# Altium PCB ESP32-USBC.PcbDoc (part 2 of 3)
Units mil, origin at the board's own origin, x right, y up, seen from the top; angles counter-clockwise.
Board outline 2700 x 1000 mil, 4 copper layers (L1, L2, L3, L4), stack 61.583 mil thick; 64 components, 73 nets, 299 pads, 160 vias.
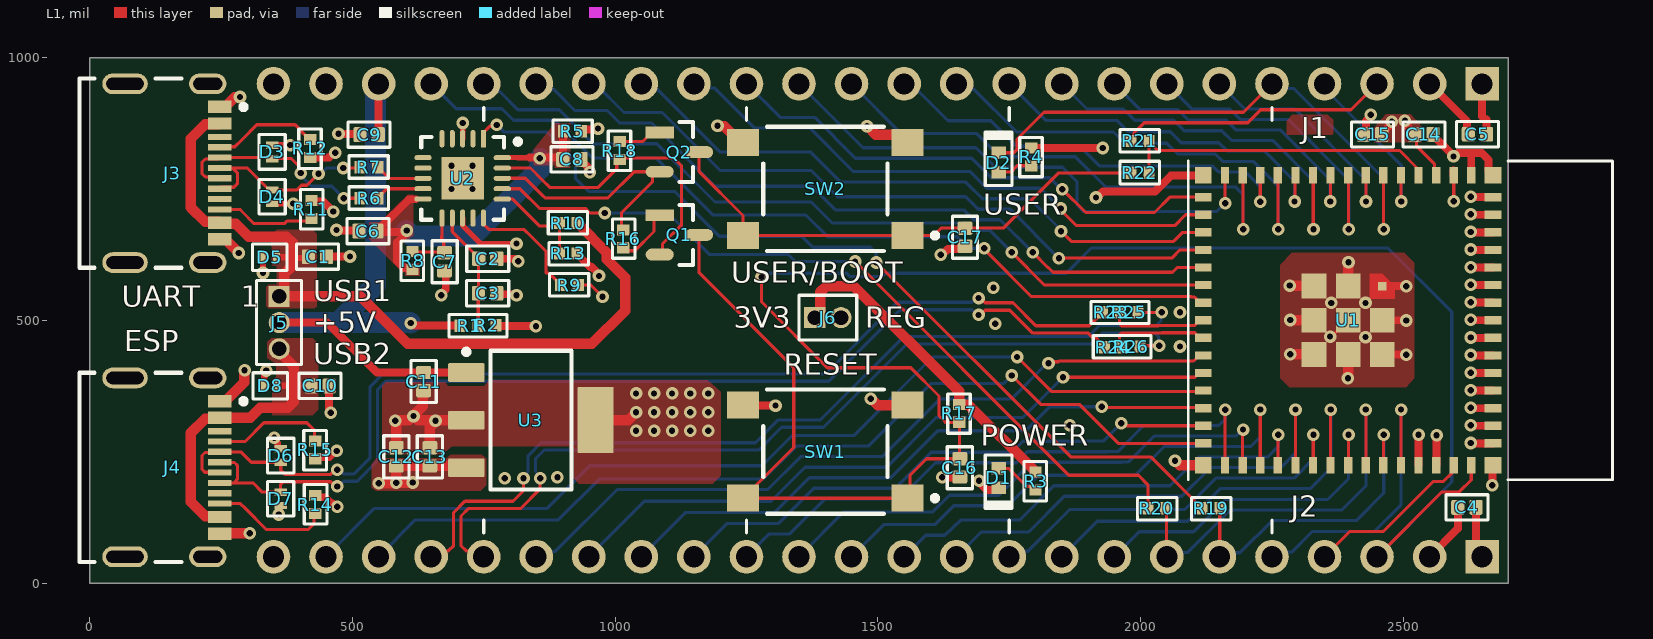
[diagram p0: L1 view]

## Part data (continued)
R3 R4: library part RC0402FR-071KL, "1 kOhms ±1% 0.063W, 1/16W Chip Resistor 0402 (1005 Metric) Moisture Resistant Thick Film", Case Code (Imperial)=0402, LCSC Part Number=C106235, Manufacturer="Yageo Group", Max Operating Temperature=155°C, Min Operating Temperature=-55°C, Power Dissipation=62.5mW, Power Rating=63mW, Temperature Coefficient=100ppm/°C, Tolerance=1%, Voltage Rating=50V, Case Code (Metric)=0402, Case/Package=0402, Category="Chip SMD Resistors", China RoHS=Non-Compliant, ComponentLink1Description=https://datasheet.octopart.com:443/RC0402FR-071KL-Yageo-datasheet-175887523.pdf?src-supplier=IHS, ComponentLink1URL=https://datasheet.octopart.com:443/RC0402FR-071KL-Yageo-datasheet-175887523.pdf?src-supplier=IHS, ComponentLink2Description=https://datasheet.octopart.com:443/RC0402FR-071KL-Yageo-datasheet-164759695.pdf?src-supplier=Upverter, ComponentLink2URL=https://datasheet.octopart.com:443/RC0402FR-071KL-Yageo-datasheet-164759695.pdf?src-supplier=Upverter, ComponentLink3Description=https://datasheet.octopart.com:443/RC0402FR-071KL-Yageo-datasheet-103092701.pdf?src-supplier=Upverter, ComponentLink3URL=https://datasheet.octopart.com:443/RC0402FR-071KL-Yageo-datasheet-103092701.pdf?src-supplier=Upverter, ComponentLink4Description=https://sigma.octopart.com:443/138820526/technical_drawing/Yageo-RC0402FR-071KL.pdf?src-supplier=Upverter, ComponentLink4URL=https://sigma.octopart.com:443/138820526/technical_drawing/Yageo-RC0402FR-071KL.pdf?src-supplier=Upverter, ComponentLink5Description=https://datasheet.octopart.com:443/RC0402FR-071KL-Yageo-datasheet-98239111.pdf?src-supplier=Upverter, ComponentLink5URL=https://datasheet.octopart.com:443/RC0402FR-071KL-Yageo-datasheet-98239111.pdf?src-supplier=Upverter, ComponentLink6Description=https://datasheet.octopart.com:443/RC0402FR-071KL-Yageo-datasheet-10408619.pdf?src-supplier=Newark, ComponentLink6URL=https://datasheet.octopart.com:443/RC0402FR-071KL-Yageo-datasheet-10408619.pdf?src-supplier=Newark, ComponentLink7Description=https://datasheet.octopart.com:443/RC0402FR-071KL-Yageo-datasheet-8324527.pdf?src-supplier=Newark, ComponentLink7URL=https://datasheet.octopart.com:443/RC0402FR-071KL-Yageo-datasheet-8324527.pdf?src-supplier=Newark, ComponentLink8Description=https://datasheet.octopart.com:443/RC0402FR-071KL-Yageo-datasheet-62067350.pdf?src-supplier=Farnell, ComponentLink8URL=https://datasheet.octopart.com:443/RC0402FR-071KL-Yageo-datasheet-62067350.pdf?src-supplier=Farnell, ComponentLink9Description=https://datasheet.octopart.com:443/RC0402FR-071KL-Yageo-datasheet-12531192.pdf?src-supplier=Future+Electronics, ComponentLink9URL=https://datasheet.octopart.com:443/RC0402FR-071KL-Yageo-datasheet-12531192.pdf?src-supplier=Future+Electronics, ComponentLink10Description=https://datasheet.octopart.com:443/RC0402FR-071KL-Yageo-datasheet-137700087.pdf?src-supplier=Future+Electronics, ComponentLink10URL=https://datasheet.octopart.com:443/RC0402FR-071KL-Yageo-datasheet-137700087.pdf?src-supplier=Future+Electronics, ComponentLink11Description=https://datasheet.octopart.com:443/RC0402FR-071KL-Yageo-datasheet-8324255.pdf?src-supplier=Future+Electronics, ComponentLink11URL=https://datasheet.octopart.com:443/RC0402FR-071KL-Yageo-datasheet-8324255.pdf?src-supplier=Future+Electronics, ComponentLink12Description=https://datasheet.octopart.com:443/RC0402FR-071KL-Yageo-datasheet-8329306.pdf?src-supplier=element14, ComponentLink12URL=https://datasheet.octopart.com:443/RC0402FR-071KL-Yageo-datasheet-8329306.pdf?src-supplier=element14, ComponentLink13Description=https://datasheet.octopart.com:443/RC0402FR-071KL-Yageo-datasheet-505231.pdf?src-supplier=element14, ComponentLink13URL=https://datasheet.octopart.com:443/RC0402FR-071KL-Yageo-datasheet-505231.pdf?src-supplier=element14, ComponentLink14Description=https://datasheet.octopart.com:443/RC0402FR-071KL-Yageo-datasheet-175423674.pdf?src-supplier=SOS+electronic, ComponentLink14URL=https://datasheet.octopart.com:443/RC0402FR-071KL-Yageo-datasheet-175423674.pdf?src-supplier=SOS+electronic, ComponentLink15Description=https://datasheet.octopart.com:443/RC0402FR-071KL-Yageo-datasheet-148775077.pdf?src-supplier=TME, ComponentLink15URL=https://datasheet.octopart.com:443/RC0402FR-071KL-Yageo-datasheet-148775077.pdf?src-supplier=TME, ComponentLink16Description=https://datasheet.octopart.com:443/RC0402FR-071KL-Yageo-datasheet-79472498.pdf?src-supplier=Megastar, ComponentLink16URL=https://datasheet.octopart.com:443/RC0402FR-071KL-Yageo-datasheet-79472498.pdf?src-supplier=Megastar, ComponentLink17Description=https://datasheet.octopart.com/RC0402FR-071KL-Yageo-datasheet-73766026.pdf, ComponentLink17URL=https://datasheet.octopart.com/RC0402FR-071KL-Yageo-datasheet-73766026.pdf, ComponentLink18Description=http://sigma.octopart.com:80/rohs_statement/Yageo-company-2.pdf?src-supplier=Compliance+Statements, ComponentLink18URL=http://sigma.octopart.com:80/rohs_statement/Yageo-company-2.pdf?src-supplier=Compliance+Statements, ComponentLink19Description=http://sigma.octopart.com:80/conflict_mineral_statement/Yageo-company-3.pdf?src-supplier=Compliance+Statements, ComponentLink19URL=http://sigma.octopart.com:80/conflict_mineral_statement/Yageo-company-3.pdf?src-supplier=Compliance+Statements, Composition="Thick Film", Depth=500µm, Height=350µm, Lead Free="Lead Free", Length=1mm, Lifecycle Status=Production, Manufacturer Part Number=RC0402FR-071KL, Military Standard=Not, Mounting Technology="Surface Mount", Number of Terminals=2, Packaging="Tape & Reel", Pins=2, Pricing="1=0.1, 10=0.007, 25=0.0068, 50=0.0062, 100=0.0056, 250=0.00308 (USD)", REACH SVHC=Yes, RoHS=Compliant, Schedule B="8533210045, 8533210045|8533210045|8533210045|8533210045|8533210045|8533210045|8533210045|8533210045|8533210045|8533210045|8533210045|8533210045|8533210045|8533210045|8533210045|8533210045|8533210045|8533210045|8533210045|8533210045|8533210045|8533210045|8533210045|85", Stock=292171, Supplier=DigiKey, Termination=SMD/SMT, Voltage Rating (AC)=50V, Voltage Rating (DC)=50V, Width=500µm, Working Voltage=50V
R6 R7 R21 R22: library part RC0402FR-0727RL, "27 Ohms ±1% 0.063W, 1/16W Chip Resistor 0402 (1005 Metric) Moisture Resistant Thick Film", Case Code (Imperial)=0402, Case Code (Metric)=1005, LCSC Part Number=C138021, Manufacturer="Yageo Group", Max Operating Temperature=155°C, Max Power Dissipation=63mW, Min Operating Temperature=-55°C, Power Dissipation=62.5mW, Temperature Coefficient=100ppm/°C, Tolerance=1%, Voltage Rating=50V, Case/Package=0402, Category="Chip SMD Resistors", China RoHS=Non-Compliant, ComponentLink1Description=https://datasheet.octopart.com:443/RC0402FR-0727RL-Yageo-datasheet-175887523.pdf?src-supplier=Newark, ComponentLink1URL=https://datasheet.octopart.com:443/RC0402FR-0727RL-Yageo-datasheet-175887523.pdf?src-supplier=Newark, ComponentLink2Description=https://datasheet.octopart.com:443/RC0402FR-0727RL-Yageo-datasheet-8324527.pdf?src-supplier=Newark, ComponentLink2URL=https://datasheet.octopart.com:443/RC0402FR-0727RL-Yageo-datasheet-8324527.pdf?src-supplier=Newark, ComponentLink3Description=https://datasheet.octopart.com:443/RC0402FR-0727RL-Yageo-datasheet-103092701.pdf?src-supplier=Upverter, ComponentLink3URL=https://datasheet.octopart.com:443/RC0402FR-0727RL-Yageo-datasheet-103092701.pdf?src-supplier=Upverter, ComponentLink4Description=https://datasheet.octopart.com:443/RC0402FR-0727RL-Yageo-datasheet-10408619.pdf?src-supplier=element14+APAC, ComponentLink4URL=https://datasheet.octopart.com:443/RC0402FR-0727RL-Yageo-datasheet-10408619.pdf?src-supplier=element14+APAC, ComponentLink5Description=https://datasheet.octopart.com:443/RC0402FR-0727RL-Yageo-datasheet-62067350.pdf?src-supplier=element14+APAC, ComponentLink5URL=https://datasheet.octopart.com:443/RC0402FR-0727RL-Yageo-datasheet-62067350.pdf?src-supplier=element14+APAC, ComponentLink6Description=https://datasheet.octopart.com:443/RC0402FR-0727RL-Yageo-datasheet-175423674.pdf?src-supplier=SOS+electronic, ComponentLink6URL=https://datasheet.octopart.com:443/RC0402FR-0727RL-Yageo-datasheet-175423674.pdf?src-supplier=SOS+electronic, ComponentLink7Description=https://datasheet.octopart.com:443/RC0402FR-0727RL-Yageo-datasheet-8329306.pdf?src-supplier=SOS+electronic, ComponentLink7URL=https://datasheet.octopart.com:443/RC0402FR-0727RL-Yageo-datasheet-8329306.pdf?src-supplier=SOS+electronic, ComponentLink8Description=https://datasheet.octopart.com:443/RC0402FR-0727RL-Yageo-datasheet-164759695.pdf?src-supplier=Future+Electronics, ComponentLink8URL=https://datasheet.octopart.com:443/RC0402FR-0727RL-Yageo-datasheet-164759695.pdf?src-supplier=Future+Electronics, ComponentLink9Description=https://datasheet.octopart.com:443/RC0402FR-0727RL-Yageo-datasheet-137700087.pdf?src-supplier=Future+Electronics, ComponentLink9URL=https://datasheet.octopart.com:443/RC0402FR-0727RL-Yageo-datasheet-137700087.pdf?src-supplier=Future+Electronics, ComponentLink10Description=https://datasheet.octopart.com:443/RC0402FR-0727RL-Yageo-datasheet-12531192.pdf?src-supplier=Future+Electronics, ComponentLink10URL=https://datasheet.octopart.com:443/RC0402FR-0727RL-Yageo-datasheet-12531192.pdf?src-supplier=Future+Electronics, ComponentLink11Description=https://datasheet.octopart.com:443/RC0402FR-0727RL-Yageo-datasheet-148775077.pdf?src-supplier=TME, ComponentLink11URL=https://datasheet.octopart.com:443/RC0402FR-0727RL-Yageo-datasheet-148775077.pdf?src-supplier=TME, ComponentLink12Description=https://datasheet.octopart.com/RC0402FR-0727RL-Yageo-datasheet-73766026.pdf, ComponentLink12URL=https://datasheet.octopart.com/RC0402FR-0727RL-Yageo-datasheet-73766026.pdf, ComponentLink13Description=http://sigma.octopart.com:80/rohs_statement/Yageo-company-2.pdf?src-supplier=Compliance+Statements, ComponentLink13URL=http://sigma.octopart.com:80/rohs_statement/Yageo-company-2.pdf?src-supplier=Compliance+Statements, ComponentLink14Description=http://sigma.octopart.com:80/conflict_mineral_statement/Yageo-company-3.pdf?src-supplier=Compliance+Statements, ComponentLink14URL=http://sigma.octopart.com:80/conflict_mineral_statement/Yageo-company-3.pdf?src-supplier=Compliance+Statements, Composition="Thick Film", Depth=500µm, Features="Moisture Resistant", Height=350µm, Lead Free="Lead Free", Length=1mm, Lifecycle Status=Production, Manufacturer Part Number=RC0402FR-0727RL, Military Standard=Not, Mounting Technology="Surface Mount", Number of Terminals=2, Number of Terminations=2, Pins=2, Power Rating=63mW, Pricing="1=0.1, 10=0.007, 25=0.0068, 50=0.0062, 100=0.0051, 250=0.00308 (USD)", REACH SVHC=Yes, RoHS=Compliant, Schedule B="8533210045, 8533210045|8533210045, 8533210045|8533210045|8533210045, 8533210045|8533210045|8533210045|8533210045", Stock=202809, Supplier=DigiKey, Termination=SMD/SMT, Voltage Rating (AC)=50V, Voltage Rating (DC)=50V, Weight=652.039032µg, Width=500µm, Working Voltage=50V
R9 R13 R16 R17 R18: library part AC0402FR-0710KL, "10 kOhms ±1% 0.063W, 1/16W Chip Resistor 0402 (1005 Metric) Automotive AEC-Q200, Moisture Resistant Thick Film", Case Code (Imperial)=0402, Case Code (Metric)=1005, Manufacturer="Yageo Group", Max Operating Temperature=155°C, Max Power Dissipation=63mW, Min Operating Temperature=-55°C, Power Dissipation=62.5mW, Temperature Coefficient=100ppm/°C, Tolerance=1%, Voltage Rating=50V, Case/Package=0402, Category="Chip SMD Resistors", China RoHS=Non-Compliant, ComponentLink1Description=https://datasheet.octopart.com:443/AC0402FR-0710KL-Yageo-datasheet-182189377.pdf?src-supplier=IHS, ComponentLink1URL=https://datasheet.octopart.com:443/AC0402FR-0710KL-Yageo-datasheet-182189377.pdf?src-supplier=IHS, ComponentLink2Description=https://datasheet.octopart.com:443/AC0402FR-0710KL-Yageo-datasheet-83209224.pdf?src-supplier=Upverter, ComponentLink2URL=https://datasheet.octopart.com:443/AC0402FR-0710KL-Yageo-datasheet-83209224.pdf?src-supplier=Upverter, ComponentLink3Description=https://datasheet.octopart.com:443/AC0402FR-0710KL-Yageo-datasheet-178509465.pdf?src-supplier=Newark, ComponentLink3URL=https://datasheet.octopart.com:443/AC0402FR-0710KL-Yageo-datasheet-178509465.pdf?src-supplier=Newark, ComponentLink4Description=https://datasheet.octopart.com:443/AC0402FR-0710KL-Yageo-datasheet-166720450.pdf?src-supplier=JRH+Electronics, ComponentLink4URL=https://datasheet.octopart.com:443/AC0402FR-0710KL-Yageo-datasheet-166720450.pdf?src-supplier=JRH+Electronics, ComponentLink5Description=https://datasheet.octopart.com:443/AC0402FR-0710KL-Yageo-datasheet-151884373.pdf?src-supplier=Future+Electronics, ComponentLink5URL=https://datasheet.octopart.com:443/AC0402FR-0710KL-Yageo-datasheet-151884373.pdf?src-supplier=Future+Electronics, ComponentLink6Description=https://datasheet.octopart.com:443/AC0402FR-0710KL-Yageo-datasheet-137699919.pdf?src-supplier=Future+Electronics, ComponentLink6URL=https://datasheet.octopart.com:443/AC0402FR-0710KL-Yageo-datasheet-137699919.pdf?src-supplier=Future+Electronics, ComponentLink7Description=https://datasheet.octopart.com:443/AC0402FR-0710KL-Yageo-datasheet-24580492.pdf?src-supplier=Future+Electronics, ComponentLink7URL=https://datasheet.octopart.com:443/AC0402FR-0710KL-Yageo-datasheet-24580492.pdf?src-supplier=Future+Electronics, ComponentLink8Description=https://datasheet.octopart.com:443/AC0402FR-0710KL-Yageo-datasheet-13029202.pdf?src-supplier=Future+Electronics, ComponentLink8URL=https://datasheet.octopart.com:443/AC0402FR-0710KL-Yageo-datasheet-13029202.pdf?src-supplier=Future+Electronics, ComponentLink9Description=https://datasheet.octopart.com/AC0402FR-0710KL-Yageo-datasheet-12512238.pdf, ComponentLink9URL=https://datasheet.octopart.com/AC0402FR-0710KL-Yageo-datasheet-12512238.pdf, ComponentLink10Description=https://datasheet.octopart.com:443/AC0402FR-0710KL-Yageo-Group-datasheet-164768995.pdf?src-supplier=ODG+(Origin+Data+Global), ComponentLink10URL=https://datasheet.octopart.com:443/AC0402FR-0710KL-Yageo-Group-datasheet-164768995.pdf?src-supplier=ODG+(Origin+Data+Global), ComponentLink11Description=https://datasheet.octopart.com:443/AC0402FR-0710KL-Yageo-datasheet-128677448.pdf?src-supplier=X-ON, ComponentLink11URL=https://datasheet.octopart.com:443/AC0402FR-0710KL-Yageo-datasheet-128677448.pdf?src-supplier=X-ON, ComponentLink12Description=http://sigma.octopart.com:80/rohs_statement/Yageo-company-2.pdf?src-supplier=Compliance+Statements, ComponentLink12URL=http://sigma.octopart.com:80/rohs_statement/Yageo-company-2.pdf?src-supplier=Compliance+Statements, ComponentLink13Description=http://sigma.octopart.com:80/conflict_mineral_statement/Yageo-company-3.pdf?src-supplier=Compliance+Statements, ComponentLink13URL=http://sigma.octopart.com:80/conflict_mineral_statement/Yageo-company-3.pdf?src-supplier=Compliance+Statements, Composition="Thick Film", Depth=500µm, Features="Automotive AEC-Q200, Moisture Resistant", Height=320µm, LCSC Part Number=AC0402FR-0710KL, Lead Free="Lead Free", Length=990.6µm, Lifecycle Status=Production, Manufacturer Part Number=AC0402FR-0710KL, Military Standard=Not, Mounting Technology="Surface Mount", Number of Terminals=2, Number of Terminations=2, Packaging="Tape & Reel", Power Rating=62.5mW, Pricing="1=0.1, 10=0.009, 25=0.008, 50=0.0062, 100=0.0041 (USD)", REACH SVHC=Yes, RoHS=Compliant, Schedule B="8533210045, 8533210045|8533210045|8533210045|8533210045|8533210045|8533210045|8533210045|8533210045|8533210045|8533210045|8533210045|8533210045|8533210045|8533210045|8533210045|8533210045|8533210045|8533210045|8533210045, 8533210045|8533210045|8533210045|8533210045|8533210045|8533210045|8533210045|8533210045|8533210045|8533210045|8533210045|8533210045|8533210045|8533210045|8533210045|8533210045|8533210045|8533210045|8533210045|8533210045|8533210045|8533210045|8533210045|85", Supplier=DigiKey, Termination=SMD/SMT, Width=500µm, Working Voltage=50V
R10: library part RC0402FR-074K7L, "4.7 kOhms ±1% 0.063W, 1/16W Chip Resistor 0402 (1005 Metric) Moisture Resistant Thick Film", Case Code (Imperial)=0402, Case Code (Metric)=1005, LCSC Part Number=C105871, Manufacturer="Yageo Group", Max Operating Temperature=155°C, Min Operating Temperature=-55°C, Power Dissipation=62.5mW, Power Rating=63mW, Temperature Coefficient=100ppm/°C, Tolerance=1%, Voltage Rating=50V, Case/Package=0402, Category="Chip SMD Resistors", China RoHS=Non-Compliant, ComponentLink1Description=https://datasheet.octopart.com:443/RC0402FR-074K7L-Yageo-datasheet-175887523.pdf?src-supplier=IHS, ComponentLink1URL=https://datasheet.octopart.com:443/RC0402FR-074K7L-Yageo-datasheet-175887523.pdf?src-supplier=IHS, ComponentLink2Description=https://datasheet.octopart.com:443/RC0402FR-074K7L-Yageo-datasheet-103092701.pdf?src-supplier=Upverter, ComponentLink2URL=https://datasheet.octopart.com:443/RC0402FR-074K7L-Yageo-datasheet-103092701.pdf?src-supplier=Upverter, ComponentLink3Description=https://datasheet.octopart.com:443/RC0402FR-074K7L-Yageo-datasheet-98239111.pdf?src-supplier=Upverter, ComponentLink3URL=https://datasheet.octopart.com:443/RC0402FR-074K7L-Yageo-datasheet-98239111.pdf?src-supplier=Upverter, ComponentLink4Description=https://datasheet.octopart.com:443/RC0402FR-074K7L-Yageo-datasheet-10408619.pdf?src-supplier=element14+APAC, ComponentLink4URL=https://datasheet.octopart.com:443/RC0402FR-074K7L-Yageo-datasheet-10408619.pdf?src-supplier=element14+APAC, ComponentLink5Description=https://datasheet.octopart.com:443/RC0402FR-074K7L-Yageo-datasheet-13691069.pdf?src-supplier=element14+APAC, ComponentLink5URL=https://datasheet.octopart.com:443/RC0402FR-074K7L-Yageo-datasheet-13691069.pdf?src-supplier=element14+APAC, ComponentLink6Description=https://datasheet.octopart.com:443/RC0402FR-074K7L-Yageo-datasheet-12531192.pdf?src-supplier=Newark, ComponentLink6URL=https://datasheet.octopart.com:443/RC0402FR-074K7L-Yageo-datasheet-12531192.pdf?src-supplier=Newark, ComponentLink7Description=https://datasheet.octopart.com:443/RC0402FR-074K7L-Yageo-datasheet-8324527.pdf?src-supplier=Newark, ComponentLink7URL=https://datasheet.octopart.com:443/RC0402FR-074K7L-Yageo-datasheet-8324527.pdf?src-supplier=Newark, ComponentLink8Description=https://datasheet.octopart.com:443/RC0402FR-074K7L-Yageo-datasheet-62067350.pdf?src-supplier=Farnell, ComponentLink8URL=https://datasheet.octopart.com:443/RC0402FR-074K7L-Yageo-datasheet-62067350.pdf?src-supplier=Farnell, ComponentLink9Description=https://datasheet.octopart.com:443/RC0402FR-074K7L-Yageo-datasheet-8329306.pdf?src-supplier=element14, ComponentLink9URL=https://datasheet.octopart.com:443/RC0402FR-074K7L-Yageo-datasheet-8329306.pdf?src-supplier=element14, ComponentLink10Description=https://datasheet.octopart.com:443/RC0402FR-074K7L-Yageo-datasheet-175423674.pdf?src-supplier=SOS+electronic, ComponentLink10URL=https://datasheet.octopart.com:443/RC0402FR-074K7L-Yageo-datasheet-175423674.pdf?src-supplier=SOS+electronic, ComponentLink11Description=https://datasheet.octopart.com:443/RC0402FR-074K7L-Yageo-datasheet-164759695.pdf?src-supplier=Future+Electronics, ComponentLink11URL=https://datasheet.octopart.com:443/RC0402FR-074K7L-Yageo-datasheet-164759695.pdf?src-supplier=Future+Electronics, ComponentLink12Description=https://datasheet.octopart.com:443/RC0402FR-074K7L-Yageo-datasheet-137700087.pdf?src-supplier=Future+Electronics, ComponentLink12URL=https://datasheet.octopart.com:443/RC0402FR-074K7L-Yageo-datasheet-137700087.pdf?src-supplier=Future+Electronics, ComponentLink13Description=https://datasheet.octopart.com:443/RC0402FR-074K7L-Yageo-datasheet-79472498.pdf?src-supplier=Megastar, ComponentLink13URL=https://datasheet.octopart.com:443/RC0402FR-074K7L-Yageo-datasheet-79472498.pdf?src-supplier=Megastar, ComponentLink14Description=https://datasheet.octopart.com/RC0402FR-074K7L-Yageo-datasheet-73766026.pdf, ComponentLink14URL=https://datasheet.octopart.com/RC0402FR-074K7L-Yageo-datasheet-73766026.pdf, ComponentLink15Description=http://sigma.octopart.com:80/conflict_mineral_statement/Yageo-company-3.pdf?src-supplier=Compliance+Statements, ComponentLink15URL=http://sigma.octopart.com:80/conflict_mineral_statement/Yageo-company-3.pdf?src-supplier=Compliance+Statements, ComponentLink16Description=http://sigma.octopart.com:80/rohs_statement/Yageo-company-2.pdf?src-supplier=Compliance+Statements, ComponentLink16URL=http://sigma.octopart.com:80/rohs_statement/Yageo-company-2.pdf?src-supplier=Compliance+Statements, Composition="Thick Film", Depth=500µm, Height=350µm, Lead Free="Lead Free", Length=1mm, Lifecycle Status=Production, Manufacturer Part Number=RC0402FR-074K7L, Military Standard=Not, Mounting Technology="Surface Mount", Number of Terminals=2, Packaging="Tape & Reel", Pins=2, Pricing="1=0.1, 10=0.02, 25=0.014, 50=0.0112, 100=0.009, 250=0.00688, 500=0.00566, 1000=0.00474, 5000=0.00328 (USD)", REACH SVHC=Yes, RoHS=Compliant, Schedule B="8533210045, 8533210045|8533210045, 8533210045|8533210045|8533210045, 8533210045|8533210045|8533210045|8533210045", Supplier=DigiKey, Termination=SMD/SMT, Voltage Rating (AC)=50V, Voltage Rating (DC)=50V, Width=500µm, Working Voltage=50V
R11 R12 R14 R15: library part AC0402FR-075K1L, "5.1 kOhms ±1% 0.063W, 1/16W Chip Resistor 0402 (1005 Metric) Automotive AEC-Q200, Moisture Resistant Thick Film", Case Code (Imperial)=0402, Case Code (Metric)=1005, Manufacturer="Yageo Group", Max Operating Temperature=155°C, Max Power Dissipation=63mW, Min Operating Temperature=-55°C, Power Dissipation=62.5mW, Temperature Coefficient=100ppm/°C, Tolerance=1%, Voltage Rating=50V, Case/Package=0402, Category="Chip SMD Resistors", China RoHS=Non-Compliant, ComponentLink1Description=https://datasheet.octopart.com:443/AC0402FR-075K1L-Yageo-datasheet-182189377.pdf?src-supplier=IHS, ComponentLink1URL=https://datasheet.octopart.com:443/AC0402FR-075K1L-Yageo-datasheet-182189377.pdf?src-supplier=IHS, ComponentLink2Description=https://datasheet.octopart.com:443/AC0402FR-075K1L-Yageo-datasheet-83209224.pdf?src-supplier=Upverter, ComponentLink2URL=https://datasheet.octopart.com:443/AC0402FR-075K1L-Yageo-datasheet-83209224.pdf?src-supplier=Upverter, ComponentLink3Description=https://datasheet.octopart.com:443/AC0402FR-075K1L-Yageo-datasheet-178509465.pdf?src-supplier=Newark, ComponentLink3URL=https://datasheet.octopart.com:443/AC0402FR-075K1L-Yageo-datasheet-178509465.pdf?src-supplier=Newark, ComponentLink4Description=https://datasheet.octopart.com/AC0402FR-075K1L-Yageo-datasheet-12512238.pdf, ComponentLink4URL=https://datasheet.octopart.com/AC0402FR-075K1L-Yageo-datasheet-12512238.pdf, ComponentLink5Description=https://datasheet.octopart.com:443/AC0402FR-075K1L-Yageo-datasheet-166720450.pdf?src-supplier=Future+Electronics, ComponentLink5URL=https://datasheet.octopart.com:443/AC0402FR-075K1L-Yageo-datasheet-166720450.pdf?src-supplier=Future+Electronics, ComponentLink6Description=https://datasheet.octopart.com:443/AC0402FR-075K1L-Yageo-datasheet-151884373.pdf?src-supplier=Future+Electronics, ComponentLink6URL=https://datasheet.octopart.com:443/AC0402FR-075K1L-Yageo-datasheet-151884373.pdf?src-supplier=Future+Electronics, ComponentLink7Description=https://datasheet.octopart.com:443/AC0402FR-075K1L-Yageo-datasheet-137699919.pdf?src-supplier=Future+Electronics, ComponentLink7URL=https://datasheet.octopart.com:443/AC0402FR-075K1L-Yageo-datasheet-137699919.pdf?src-supplier=Future+Electronics, ComponentLink8Description=https://datasheet.octopart.com:443/AC0402FR-075K1L-Yageo-datasheet-24580492.pdf?src-supplier=Future+Electronics, ComponentLink8URL=https://datasheet.octopart.com:443/AC0402FR-075K1L-Yageo-datasheet-24580492.pdf?src-supplier=Future+Electronics, ComponentLink9Description=https://datasheet.octopart.com:443/AC0402FR-075K1L-Yageo-datasheet-13029202.pdf?src-supplier=Future+Electronics, ComponentLink9URL=https://datasheet.octopart.com:443/AC0402FR-075K1L-Yageo-datasheet-13029202.pdf?src-supplier=Future+Electronics, ComponentLink10Description=https://datasheet.octopart.com:443/AC0402FR-075K1L-Yageo-Group-datasheet-164768995.pdf?src-supplier=ODG+(Origin+Data+Global), ComponentLink10URL=https://datasheet.octopart.com:443/AC0402FR-075K1L-Yageo-Group-datasheet-164768995.pdf?src-supplier=ODG+(Origin+Data+Global), ComponentLink11Description=http://sigma.octopart.com:80/conflict_mineral_statement/Yageo-company-3.pdf?src-supplier=Compliance+Statements, ComponentLink11URL=http://sigma.octopart.com:80/conflict_mineral_statement/Yageo-company-3.pdf?src-supplier=Compliance+Statements, ComponentLink12Description=http://sigma.octopart.com:80/rohs_statement/Yageo-company-2.pdf?src-supplier=Compliance+Statements, ComponentLink12URL=http://sigma.octopart.com:80/rohs_statement/Yageo-company-2.pdf?src-supplier=Compliance+Statements, Composition="Thick Film", Depth=500µm, Features="Automotive AEC-Q200, Moisture Resistant", Height=320µm, LCSC Part Number=AC0402FR-075K1L, Lead Free="Lead Free", Length=990.6µm, Lifecycle Status=Production, Manufacturer Part Number=AC0402FR-075K1L, Military Standard=Not, Mounting Technology="Surface Mount", Number of Terminals=2, Number of Terminations=2, Power Rating=62.5mW, Pricing="1=0.1, 10=0.009, 25=0.008, 50=0.0072, 100=0.0066, 250=0.00576, 500=0.00406 (USD)", REACH SVHC=Yes, RoHS=Compliant, Schedule B="8533210045, 8533210045|8533210045|8533210045|8533210045|8533210045|8533210045|8533210045|8533210045|8533210045|8533210045|8533210045|8533210045|8533210045|8533210045|8533210045|8533210045|8533210045|8533210045|8533210045|8533210045|8533210045|8533210045|8533210045|85", Stock=5571, Supplier=DigiKey, Width=500µm, Working Voltage=50V
SW1 SW2: "Tactile Switch SPST-NO Top Actuated Surface Mount", Case/Package=SMD/SMT, Color=Black, Contact Current Rating=50mA, Contact Resistance=100mΩ, Insulation Resistance=100GΩ, Manufacturer="C&K Components", Max Operating Temperature=60°C, Max Voltage Rating (DC)=12V, Min Operating Temperature=-20°C, Operating Force=1.96N, Actuator Material="Nylon, Polyamide", Category="Tactile Switches", ComponentLink1Description=https://datasheet.octopart.com:443/PTS645SH50SMTR92LFS-C%26K-Components-datasheet-169841344.pdf?src-supplier=Farnell, ComponentLink1URL=https://datasheet.octopart.com:443/PTS645SH50SMTR92LFS-C%26K-Components-datasheet-169841344.pdf?src-supplier=Farnell, ComponentLink2Description=https://datasheet.octopart.com:443/PTS645SH50SMTR92LFS-C%26K-Components-datasheet-165782998.pdf?src-supplier=Farnell, ComponentLink2URL=https://datasheet.octopart.com:443/PTS645SH50SMTR92LFS-C%26K-Components-datasheet-165782998.pdf?src-supplier=Farnell, ComponentLink3Description=https://datasheet.octopart.com:443/PTS645SH50SMTR92LFS-C%26K-Components-datasheet-67873720.pdf?src-supplier=Upverter, ComponentLink3URL=https://datasheet.octopart.com:443/PTS645SH50SMTR92LFS-C%26K-Components-datasheet-67873720.pdf?src-supplier=Upverter, ComponentLink4Description=https://datasheet.octopart.com:443/PTS645SH50SMTR92-LFS-C%26K-Components-datasheet-141421486.pdf?src-supplier=Upverter, ComponentLink4URL=https://datasheet.octopart.com:443/PTS645SH50SMTR92-LFS-C%26K-Components-datasheet-141421486.pdf?src-supplier=Upverter, ComponentLink5Description=https://datasheet.octopart.com:443/PTS645SH50SMTR92-LFS-C%26K-Components-datasheet-110647872.pdf?src-supplier=TME, ComponentLink5URL=https://datasheet.octopart.com:443/PTS645SH50SMTR92-LFS-C%26K-Components-datasheet-110647872.pdf?src-supplier=TME, ComponentLink6Description=https://datasheet.octopart.com:443/PTS645SH50SMTR-92-LFS-C%26K-Components-datasheet-150821959.pdf?src-supplier=TME, ComponentLink6URL=https://datasheet.octopart.com:443/PTS645SH50SMTR-92-LFS-C%26K-Components-datasheet-150821959.pdf?src-supplier=TME, ComponentLink7Description=https://datasheet.octopart.com:443/PTS645SH50SMTR92LFS-C%26K-Components-datasheet-138128951.pdf?src-supplier=Future+Electronics, ComponentLink7URL=https://datasheet.octopart.com:443/PTS645SH50SMTR92LFS-C%26K-Components-datasheet-138128951.pdf?src-supplier=Future+Electronics, ComponentLink8Description=https://datasheet.octopart.com:443/PTS645SH50SMTR92LFS-C%26K-Components-datasheet-62111174.pdf?src-supplier=Future+Electronics, ComponentLink8URL=https://datasheet.octopart.com:443/PTS645SH50SMTR92LFS-C%26K-Components-datasheet-62111174.pdf?src-supplier=Future+Electronics, ComponentLink9Description=https://datasheet.octopart.com:443/PTS645SH50SMTR92LFS-C%26K-Components-datasheet-24578962.pdf?src-supplier=Future+Electronics, ComponentLink9URL=https://datasheet.octopart.com:443/PTS645SH50SMTR92LFS-C%26K-Components-datasheet-24578962.pdf?src-supplier=Future+Electronics, ComponentLink10Description=https://datasheet.octopart.com:443/PTS645SH50SMTR92-LFS-C%26K-Components-datasheet-12590747.pdf?src-supplier=Future+Electronics, ComponentLink10URL=https://datasheet.octopart.com:443/PTS645SH50SMTR92-LFS-C%26K-Components-datasheet-12590747.pdf?src-supplier=Future+Electronics, Contact Material=Bronze, Contact Plating=Silver, Current Rating=50mA, Depth=9mm, Electrical Life=100kcycles, Height=3.4544mm, Illumination Type="Illuminated, Non-Illuminated", LCSC Part Number=PTS645SH50SMTR92LFS, Lead Free="Lead Free", Length=6mm, Life (Cycles)=100kcycles, Lifecycle Status=Production, Manufacturer Part Number=PTS645SH50SMTR92LFS, Max Current Rating=50mA, Mechanical Life=100kcycles, Mounting Technology="Surface Mount", Number of Positions=1, Orientation=Straight, Packaging="Tape & Reel (TR)", Pricing="1=0.35, 10=0.3, 25=0.2804, 100=0.251, 250=0.23256, 500=0.21948 (USD)", REACH SVHC=Yes, RoHS=Compliant, Stock=1487, Supplier=DigiKey, Switch Function=Off-Mom, Termination="Gull Wing", Throw Configuration=SPST, Voltage Rating (DC)=12V
U1: "20.5dBm ESP32-S3FN8 Chip 2.4GHz SMD WiFi Modules ROHS", LCSC Part Number=C2913206, Manufacturer="Espressif Systems", Category="RF Transceiver Modules and Modems", ComponentLink1Description=https://datasheet.octopart.com:443/ESP32-S3-MINI-1-N8-Espressif-Systems-datasheet-188867343.pdf?src-supplier=TME, ComponentLink1URL=https://datasheet.octopart.com:443/ESP32-S3-MINI-1-N8-Espressif-Systems-datasheet-188867343.pdf?src-supplier=TME, ComponentLink2Description=https://datasheet.octopart.com:443/ESP32-S3-MINI-1-N8-Espressif-Systems-datasheet-165560562.pdf?src-supplier=TME, ComponentLink2URL=https://datasheet.octopart.com:443/ESP32-S3-MINI-1-N8-Espressif-Systems-datasheet-165560562.pdf?src-supplier=TME, ComponentLink3Description=https://datasheet.octopart.com:443/ESP32-S3-MINI-1-N8-Espressif-Systems-datasheet-165560559.pdf?src-supplier=TME, ComponentLink3URL=https://datasheet.octopart.com:443/ESP32-S3-MINI-1-N8-Espressif-Systems-datasheet-165560559.pdf?src-supplier=TME, Manufacturer Part Number=ESP32-S3-MINI-1-N8, Pricing="1=5.28, 10=4.566, 25=4.3196, 100=3.9802, 250=3.7768 (USD)", RoHS=Compliant, Stock=3959, Supplier=DigiKey
U2: "USB Bridge, USB to UART USB 2.0 UART Interface 20-QFN (4x4)", Ambient Temperature Range High=85°C, Case/Package=QFN, LCSC Part Number=C132159, Manufacturer=FTDI, Max Supply Current=8.4mA, Max Supply Voltage=5.5V, Min Operating Temperature=-40°C, Min Supply Voltage=2.97V, Operating Supply Current=8mA, Operating Supply Voltage=5V, Category="Interface ICs", Clock Rate=12.02MHz, ComponentLink1Description=https://datasheet.octopart.com:443/FT231XQ-R-FTDI-datasheet-182343132.pdf?src-supplier=IHS, ComponentLink1URL=https://datasheet.octopart.com:443/FT231XQ-R-FTDI-datasheet-182343132.pdf?src-supplier=IHS, ComponentLink2Description=https://datasheet.octopart.com:443/FT231XQ-R-FTDI-datasheet-11021087.pdf?src-supplier=ODG+(Origin+Data+Global), ComponentLink2URL=https://datasheet.octopart.com:443/FT231XQ-R-FTDI-datasheet-11021087.pdf?src-supplier=ODG+(Origin+Data+Global), ComponentLink3Description=https://datasheet.octopart.com:443/FT231XQ-R-FTDI-datasheet-28834672.pdf?src-supplier=SOS+electronic, ComponentLink3URL=https://datasheet.octopart.com:443/FT231XQ-R-FTDI-datasheet-28834672.pdf?src-supplier=SOS+electronic, ComponentLink4Description=https://datasheet.octopart.com:443/FT231XQ-R-FTDI-datasheet-68321328.pdf?src-supplier=TME, ComponentLink4URL=https://datasheet.octopart.com:443/FT231XQ-R-FTDI-datasheet-68321328.pdf?src-supplier=TME, ComponentLink5Description=https://datasheet.octopart.com:443/FT231XQ-R-FTDI-datasheet-134530624.pdf?src-supplier=SHENGYU+ELECTRONICS, ComponentLink5URL=https://datasheet.octopart.com:443/FT231XQ-R-FTDI-datasheet-134530624.pdf?src-supplier=SHENGYU+ELECTRONICS, Data Rate=12Mbps, Height=800µm, Height - Seated (Max)=800µm, Interface="UART, USB", Lead Free="Lead Free", Length=4mm, Lifecycle Status=Production, Manufacturer Part Number=FT231XQ-R, Max Operating Temperature=85°C, Mounting Technology="Surface Mount", Number of Channels=1, Number of Terminals=20, Pins=20, Pricing="1=2.34, 25=2.27, 100=2.2, 250=2, 500=1.82002, 1000=1.7625 (USD)", REACH SVHC=Yes, RoHS=Compliant, Supplier=DigiKey, Terminal Pitch=500µm, Weight=123.008581mg, Width=4mm
U3: "Linear Voltage Regulator IC Positive Fixed 1 Output 1.5A SOT-223-4", Case/Package=SOT-223, Dropout Voltage=340mV, Input Bias Current=1mA, LCSC Part Number=C181262, Manufacturer="Texas Instruments", Manufacturer Lifecycle Status=ACTIVE, Max Operating Temperature=125°C, Max Output current=1.5A, Max Output Voltage=3.3V, Max Supply Voltage=20V, Min Current Limit=1.6A, Min Input Voltage=2.1V, Min Operating Temperature=-40°C, Accuracy=3%, Category="LDO Voltage Regulators", ComponentLink1Description=https://datasheet.octopart.com:443/TL1963A-33DCYR-Texas-Instruments-datasheet-36835243.pdf?src-supplier=Texas+Instruments, ComponentLink1URL=https://datasheet.octopart.com:443/TL1963A-33DCYR-Texas-Instruments-datasheet-36835243.pdf?src-supplier=Texas+Instruments, ComponentLink2Description=https://octopart.com:443/opatz8j6/c1?t=mAWMzEtfbiLovKOj3NvR6ic_x_4jwTe4E2SZTknA0Wi55ulc8gSBrZEaPJGpST0qo5UOLz7FCMwdzgXA3tMUzi99Y1mT-QWpFFv9L2s0p6yc-7bXBZPDny6i8ZRsr5wS2w_ePUtxtIlEycZlN8Nmi5QWMaI5EsifEEETbWMMI_RPqu2676NOu4UEp3gsNOn3mRlaUQSwO_Dc_rESnSQHrPRN2enMyPWrjbXDaC2YKh82NAwuihzeJLq3kzRepzFMOePxomNIBFIOd8cCE2_uxtou_y-FjsvPQ1Ndyi1kxZv7DD8Qd0DmV0WoDecB-CDrSpYn9Yk2VH8v-J_OyKi7BR1YrRqLP6FhVxa2hW3lLAyKGiknFyp9fdJCAMUVgm6efcQHAQ&src-supplier=Texas+Instruments, ComponentLink2URL=https://octopart.com:443/opatz8j6/c1?t=mAWMzEtfbiLovKOj3NvR6ic_x_4jwTe4E2SZTknA0Wi55ulc8gSBrZEaPJGpST0qo5UOLz7FCMwdzgXA3tMUzi99Y1mT-QWpFFv9L2s0p6yc-7bXBZPDny6i8ZRsr5wS2w_ePUtxtIlEycZlN8Nmi5QWMaI5EsifEEETbWMMI_RPqu2676NOu4UEp3gsNOn3mRlaUQSwO_Dc_rESnSQHrPRN2enMyPWrjbXDaC2YKh82NAwuihzeJLq3kzRepzFMOePxomNIBFIOd8cCE2_uxtou_y-FjsvPQ1Ndyi1kxZv7DD8Qd0DmV0WoDecB-CDrSpYn9Yk2VH8v-J_OyKi7BR1YrRqLP6FhVxa2hW3lLAyKGiknFyp9fdJCAMUVgm6efcQHAQ&src-supplier=Texas+Instruments, ComponentLink3Description=https://datasheet.octopart.com:443/TL1963A-33DCYR-Texas-Instruments-datasheet-10255270.pdf?src-supplier=Texas+Instruments, ComponentLink3URL=https://datasheet.octopart.com:443/TL1963A-33DCYR-Texas-Instruments-datasheet-10255270.pdf?src-supplier=Texas+Instruments, ComponentLink4Description=https://sigma.octopart.com:443/49253063/technical_drawing/Texas-Instruments-TL1963A-33DCYR.pdf?src-supplier=Texas+Instruments, ComponentLink4URL=https://sigma.octopart.com:443/49253063/technical_drawing/Texas-Instruments-TL1963A-33DCYR.pdf?src-supplier=Texas+Instruments, ComponentLink5Description=https://datasheet.octopart.com:443/TL1963A-33DCYR-Texas-Instruments-datasheet-159117591.pdf?src-supplier=Augswan, ComponentLink5URL=https://datasheet.octopart.com:443/TL1963A-33DCYR-Texas-Instruments-datasheet-159117591.pdf?src-supplier=Augswan, ComponentLink6Description=https://datasheet.octopart.com:443/TL1963A-33DCYR-Texas-Instruments-datasheet-21820479.pdf?src-supplier=Newark, ComponentLink6URL=https://datasheet.octopart.com:443/TL1963A-33DCYR-Texas-Instruments-datasheet-21820479.pdf?src-supplier=Newark, ComponentLink7Description=https://datasheet.octopart.com:443/TL1963A-33DCYR-Texas-Instruments-datasheet-16079880.pdf?src-supplier=Farnell, ComponentLink7URL=https://datasheet.octopart.com:443/TL1963A-33DCYR-Texas-Instruments-datasheet-16079880.pdf?src-supplier=Farnell, ComponentLink8Description=https://datasheet.octopart.com:443/TL1963A-33DCYR-Texas-Instruments-datasheet-14171511.pdf?src-supplier=iiiC, ComponentLink8URL=https://datasheet.octopart.com:443/TL1963A-33DCYR-Texas-Instruments-datasheet-14171511.pdf?src-supplier=iiiC, ComponentLink9Description=http://sigma.octopart.com:80/conflict_mineral_statement/Texas-Instruments-company-63.pdf?src-supplier=Compliance+Statements, ComponentLink9URL=http://sigma.octopart.com:80/conflict_mineral_statement/Texas-Instruments-company-63.pdf?src-supplier=Compliance+Statements, ComponentLink10Description=http://sigma.octopart.com:80/reach_statement/Texas-Instruments-company-64.pdf?src-supplier=Compliance+Statements, ComponentLink10URL=http://sigma.octopart.com:80/reach_statement/Texas-Instruments-company-64.pdf?src-supplier=Compliance+Statements, Contact Plating=Tin, Height=1.8mm, Lead Free="Lead Free", Length=6.5mm, Lifecycle Status=Production, Manufacturer Part Number=TL1963A-33DCYR, Min Output Voltage=3.3V, Nominal Output Voltage=3.3V, Number of Outputs=1, Number of Regulators=1, Output Current=1.5A, Output Type=Fixed, Output Voltage=3.3V, Pins=4, Polarity=Positive, Pricing="1=3.13, 10=2.344, 25=2.1476, 100=1.9323, 250=1.82956, 500=1.76766, 1000=1.71669 (USD)", Quiescent Current=1mA, Radiation Hardening=No, REACH SVHC=No, RoHS=Compliant, Schedule B="8542390000, 8542390000|8542390000|8542390000|8542390000|8542390000", Stock=6431, Supplier=DigiKey, Thickness=1.6mm, Width=3.5mm

## Via types
v1: diameter 24, hole 12, L1 to L4, tented both sides, 160 vias

## Nets (pads, with @x,y where several pads share a name; then routed paths per layer and width w, separated by ;. In a path a pad name is that pad's centre, name@x,y a point inside that pad or via, vN(x,y) a via of type N, cw(c..) or ccw(c..) an arc to the next point about the centre after c; other vN are vias at no path point)
+3V3: C4.2 C5.2 C14.2 C15.2 J1.2 J2.1 J6.1 R2.1 R3.2 R4.2 R5.1 R17.2 U1.3 | length 4600.6
  L1 w6: C14.2@2521.9,859.27 2525.34,855.83 2525.34,830.85 2559.49,796.71 2559.49,778.46 U1.3@2562.36,775.59
  L1 w15: R2.1@773.27,490.2 774.1,489.38 848.58,489.38 v1(849.4,488.55) ; R5.1@935.6,859.95 938.68,863.03 965.73,863.03 v1(967.45,864.75) ; R4.2@1792,828 v1@1928.3,828 ; C15.2@2458.7,853.55 2458.7,855.12 2476.38,872.8 2476.38,876.18 v1(2478.1,877.9) ; v1(2503,879.5) 2503,877.06 2507.6,872.46 2507.6,869.42 2517.75,859.27 C14.2@2521.9,859.27 ; J1.2@2550,950 2621.48,878.52 2621.48,856.23 C5.2@2623.72,854 ; C4.2@2638.28,144 2638.28,61.72 J2.1@2650,50
  L1 w20: J6.1@1380,505 1390,515 1390,553.28 1401.72,565 1454.1,565 1654.61,364.49 1654.61,340.41 1655.63,339.39 1672.34,339.39 1798.29,213.44 1798.29,211.73 1798.92,211.1 R3.2@1800.1,211.1
  L2 w20: J1.2@2550,950 2550,943.65 2550,339.54 2596.04,293.5 2596.04,213.81 2650,159.85 J2.1@2650,50
  L2 w40: v1(849.4,488.55) 894.9,534.05 894.9,789.12 929.23,823.45 967.45,823.45 1380,823.45 ; 967.45,840.93 v1(967.45,864.75) ; J6.1@1380,505 1380,823.45 ; J1.2@2550,943.65 2550,943.51 2519.45,912.95 2519.45,895.95 v1(2503,879.5) 2501.4,877.9 v1(2478.1,877.9) 2478.1,871.75 2429.8,823.45 1928.3,823.45 1380,823.45
  other v1: 1928.3,827.9
+3V3_FTDI: C6.2 C8.2 R5.2 R8.1 U2.10 U2.20 | length 758.1
  L1 w10.01: U2.20@785.57,809.53 815.16,809.53 ; 815,809.37 837.47,809.37
  L1 w15: C6.2@547.12,669.7 548.7,668.13 591.66,668.13 598.44,668.13 599.34,669.03 599.97,669.03 v1@600.88,668.13 ; C6.2@547.69,671.84 552.22,676.37 554.36,676.37 608.19,730.2 U2.10@620.16,730.2 ; v1(603.5,670.75) 601.78,669.03 601.78,665.01 597.12,660.36 585.3,648.54 585.3,612.78 598.31,599.77 611.48,599.77 R8.1@614.61,596.64 ; 837.47,809.37 856.9,809.37 897.41,809.37 C8.2@900.53,806.25 901.06,806.78 R5.2@901.06,858.24 ; R5.2@898.45,855.64 R5.2@901.06,858.24 ; R5.2@901.58,859.95 901.58,858.77 R5.2@901.06,858.24
  L4 w40: v1(603.5,670.75) 613.89,660.36 729.06,660.36 856.9,788.2 v1(856.9,808.15)
+3V3_REG: C12.2 C13.2 J6.2 U3.3 | length 1213.4
  L1 w20: v1(550.2,189.65) 550.85,190.3 583.05,190.3 v1(583.7,190.95) ; v1(614.9,191.2) 614.78,191.08 583.83,191.08 v1(583.7,190.95) ; C13.2@647.5,222.85 C12.2@583.7,222.85 v1(583.7,190.95) ; C13.2@649.07,222.85 713.57,222.85 U3.3@716.97,219.45
  L2 w40: v1(614.9,191.2) 699.11,191.2 ; 1430,456.7 J6.2@1430,505
  L2 w60: 699.11,191.2 964.61,456.7 1297.3,456.7 1309,445 1418.3,445 1430,456.7
+5V: C9.2 C11.2 J1.22 J5.2 R1.1 U3.1 | length 1310.3
  L1 w15: J5.2@360.85,495.55 451.91,495.55 546.84,400.62 C11.2@635.67,400.62 ; C9.2@549.18,853.21 549.59,853.62 549.59,949.59 J1.22@550,950 ; v1(610.95,494.65) 613.38,494.65 617.84,490.2 704.28,490.2 R1.1@705.24,489.24 ; 651.41,400.55 U3.1@716.97,400.55
  L4 w40: J5.2@360.85,495.55 610.05,495.55 v1(610.95,494.65) ; 472.7,495.55 543.95,566.8 543.95,926.98 545.41,928.44 545.41,945.41 J1.22@550,950
+5V_VBUS1: C1.2 D5.2 J3.A4B9 J3.B4A9 J5.1 R10.2 | length 1526.5
  L1 w12: D5.2@355.59,620 382.17,620 384.84,622.66 388.9,618.6 ; 386.24,618.6 416.07,618.6 416.07,620.47 C1.2@416.55,620.95
  L1 w20: J3.A4B9@247.64,874.41 245.83,872.6 220.25,872.6 192.87,845.22 192.87,714.62 220.25,687.24 245.83,687.24 J3.B4A9@247.64,685.43 249.45,683.62 277.9,683.62 302.67,658.85 374.52,658.85 386.24,647.13 386.24,618.6 386.24,603.66 370.85,588.27 370.85,555.55 J5.1@360.85,545.55 370.85,545.55 514.75,545.55 605.37,454.93 955.48,454.93 1019,518.45 1019,581 984.09,615.91 984.09,628.73 929.56,683.26 928.38,683.26 927.75,683.89 R10.2@927.75,685.07
+5V_VBUS2: C10.2 D8.2 J4.A4B9 J4.B4A9 J5.3 | length 594.1
  L1 w12: D8.2@356.9,375.1 388.5,375.12 C10.2@421.46,375.12
  L1 w20: J4.B4A9@247.64,125.59 245.83,127.4 220.25,127.4 192.97,154.68 192.97,285.48 220.25,312.76 245.83,312.76 J4.A4B9@247.64,314.57 306.16,314.57 325.14,333.55 376.78,333.55 388.5,345.27 388.5,375.12 388.5,412.49 360.85,440.14 J5.3@360.85,445.55
BTN_GPIO0: C17.2 Q2.3 R22.1 SW2.1 SW2.2 | length 980.9
  L1 w6: Q2.3@1159.85,820 1159.85,782.95 1243.5,699.3 SW2.2@1243.5,661.42 1606.42,661.42 1620.28,675.28 C17.2@1666,675.28 1738.95,675.28 1844.17,780.5 R22.1@1981.83,780.5
CHIP-PU: C16.2 J2.3 Q1.3 R17.1 SW1.1 SW1.2 U1.45 | length 3876.1
  L1 w6: Q1.3@1159.85,662.4 1159.85,590.15 1340,410 1340,257.91 SW1.2@1243.5,161.42 SW1.1@1556.5,161.42 ; v1(1278.7,582.15) 1278.7,535.09 1404.09,409.7 1562.69,409.7 1616.48,355.92 1616.48,318.63 1625.91,309.19 1625.91,308.81 1629.43,305.3 1654.3,305.3 R17.1@1655,306 1655.5,305.5 1655.5,237.07 C16.2@1656,236.57 1592.57,236.57 1561.56,205.56 1561.56,161.56 SW1.1@1561.42,161.42 ; J2.3@2450,50 2573.17,173.17 2584.25,173.17 2584.57,173.5 2606.7,173.5 2629.29,196.09 U1.45@2629.29,224.41
  L4 w6: v1(1278.7,582.15) 1282.49,582.15 1289.94,589.6 1440.82,589.6 1447.42,583 1507.98,583 1514.58,589.6 1858.53,589.6 1906.45,637.52 2470.66,637.52 2592.25,515.93 2592.25,192.25 J2.3@2450,50
CON_ESP_USB_N: J2.21 R25.1 | length 1707.4
  L1 w6.03: J2.21@650,50 661.09,61.09 682.91,61.09 692.77,70.95 692.77,134.22 714.28,155.73 805.73,155.73 825.8,175.8 v1(825.8,199.65) ; R25.1@1995,515 v1(2040,515)
  L4 w6.03: v1(825.8,199.65) 825.8,203.42 834.55,212.17 834.55,242.49 859.04,266.98 1267.31,266.98 1310.82,310.49 1390.85,310.49 1549.24,468.88 1900.62,468.88 1921.69,489.95 2029.95,489.95 2038.65,498.65 2038.65,513.65 v1(2040,515)
CON_ESP_USB_P: J2.20 R26.1 | length 1684.1
  L1 w6.03: J2.20@750,50 738.91,61.09 716.66,61.09 706.8,70.95 706.8,127.5 721,141.7 819.99,141.7 856.89,178.61 856.89,198.74 v1(857.8,199.65) ; R26.1@1999,450 2000.56,451.56 v1(2035.44,451.56)
  L4 w6.03: v1(857.8,199.65) 857.8,202.95 848.58,212.17 848.58,236.68 864.86,252.95 1273.12,252.95 1316.64,296.46 1396.66,296.46 1555.05,454.85 1906.43,454.85 1927.5,475.92 2026.52,475.92 2034.31,468.13 2034.31,452.69 v1(2035.44,451.56)
CON_GPIO0: J1.3 R21.1 | length 518.9
  L1 w6: R21.1@1981.83,841.2 1987.46,846.83 1987.46,856.47 2006.85,875.85 2204.13,875.85 2228.78,900.5 2400.5,900.5 J1.3@2450,950
CONN1_USB_N: D3.2 J3.A7 J3.B7 R6.1 | length 404.3
  L1 w6.03: J3.A7@247.64,770.08 244.97,772.74 220.4,772.74 213.88,779.25 213.88,800.27 220.4,806.78 244.97,806.78 J3.B7@247.64,809.45 295.5,809.45 345.36,809.45 D3.2@347.3,807.51 384.33,807.51 398.61,793.23 398.61,783.49 v1(402.05,780.05) ; v1(483.76,732.19) R6.1@514.88,732.19
  L1 w6.23: R6.1@514.88,732.19 R6.1@515.25,732.55
  L4 w6.03: v1(402.05,780.05) 402.05,775.4 422.37,755.08 460.87,755.08 v1(483.76,732.19)
CONN1_USB_P: D4.2 J3.A6 J3.B6 R7.1 | length 396.7
  L1 w6.03: J3.A6@247.64,789.76 274.49,789.76 300.29,789.76 342.4,747.65 D4.2@347.32,747.65 393.93,747.65 403.32,757.04 413.79,757.04 v1(435.6,778.85) ; J3.B6@250.06,753.06 274.88,753.06 281.39,759.57 281.39,780.59 274.88,787.1 ; 274.49,787.34 281.29,780.55 281.29,759.61 ; v1(483.05,789.65) 514.18,789.65 R7.1@514.54,790.02
  L4 w6.03: v1(435.6,778.85) 440.46,778.85 451.26,789.65 v1(483.05,789.65)
CONN2_USB_N: D6.2 J4.A7 J4.B7 R23.1 | length 2063
  L1 w6.03: J4.A7@247.64,210.24 247.2,210.68 219.49,210.68 213.99,216.18 213.99,242.73 219.61,248.36 246.39,248.36 J4.B7@247.64,249.61 288.05,249.61 307.95,229.7 D6.2@363.75,229.7 363.75,214.85 371.79,206.82 458.68,206.82 467.67,215.8 v1(471.2,215.8) ; v1(1691.7,542.2) 1695.23,542.2 1704.22,533.21 1757.14,533.21 1800.84,489.52 1902.65,489.52 1926.95,513.82 R23.1@1926.95,515
  L4 w6.03: v1(471.2,215.8) 475.67,215.8 483.72,207.75 503.45,207.75 533.87,238.17 533.87,373.71 558,397.85 1400.67,397.85 1537.03,534.2 1679.18,534.2 1687.18,542.2 v1(1691.7,542.2)